# Altium PCB hub_board.PcbDoc
Units mil, origin at the board's own origin, x right, y up, seen from the top; angles counter-clockwise.
Board outline 3543.31 x 2795.28 mil, 2 copper layers (Top Layer, Bottom Layer); 59 components, 46 nets, 218 pads, 53 vias.
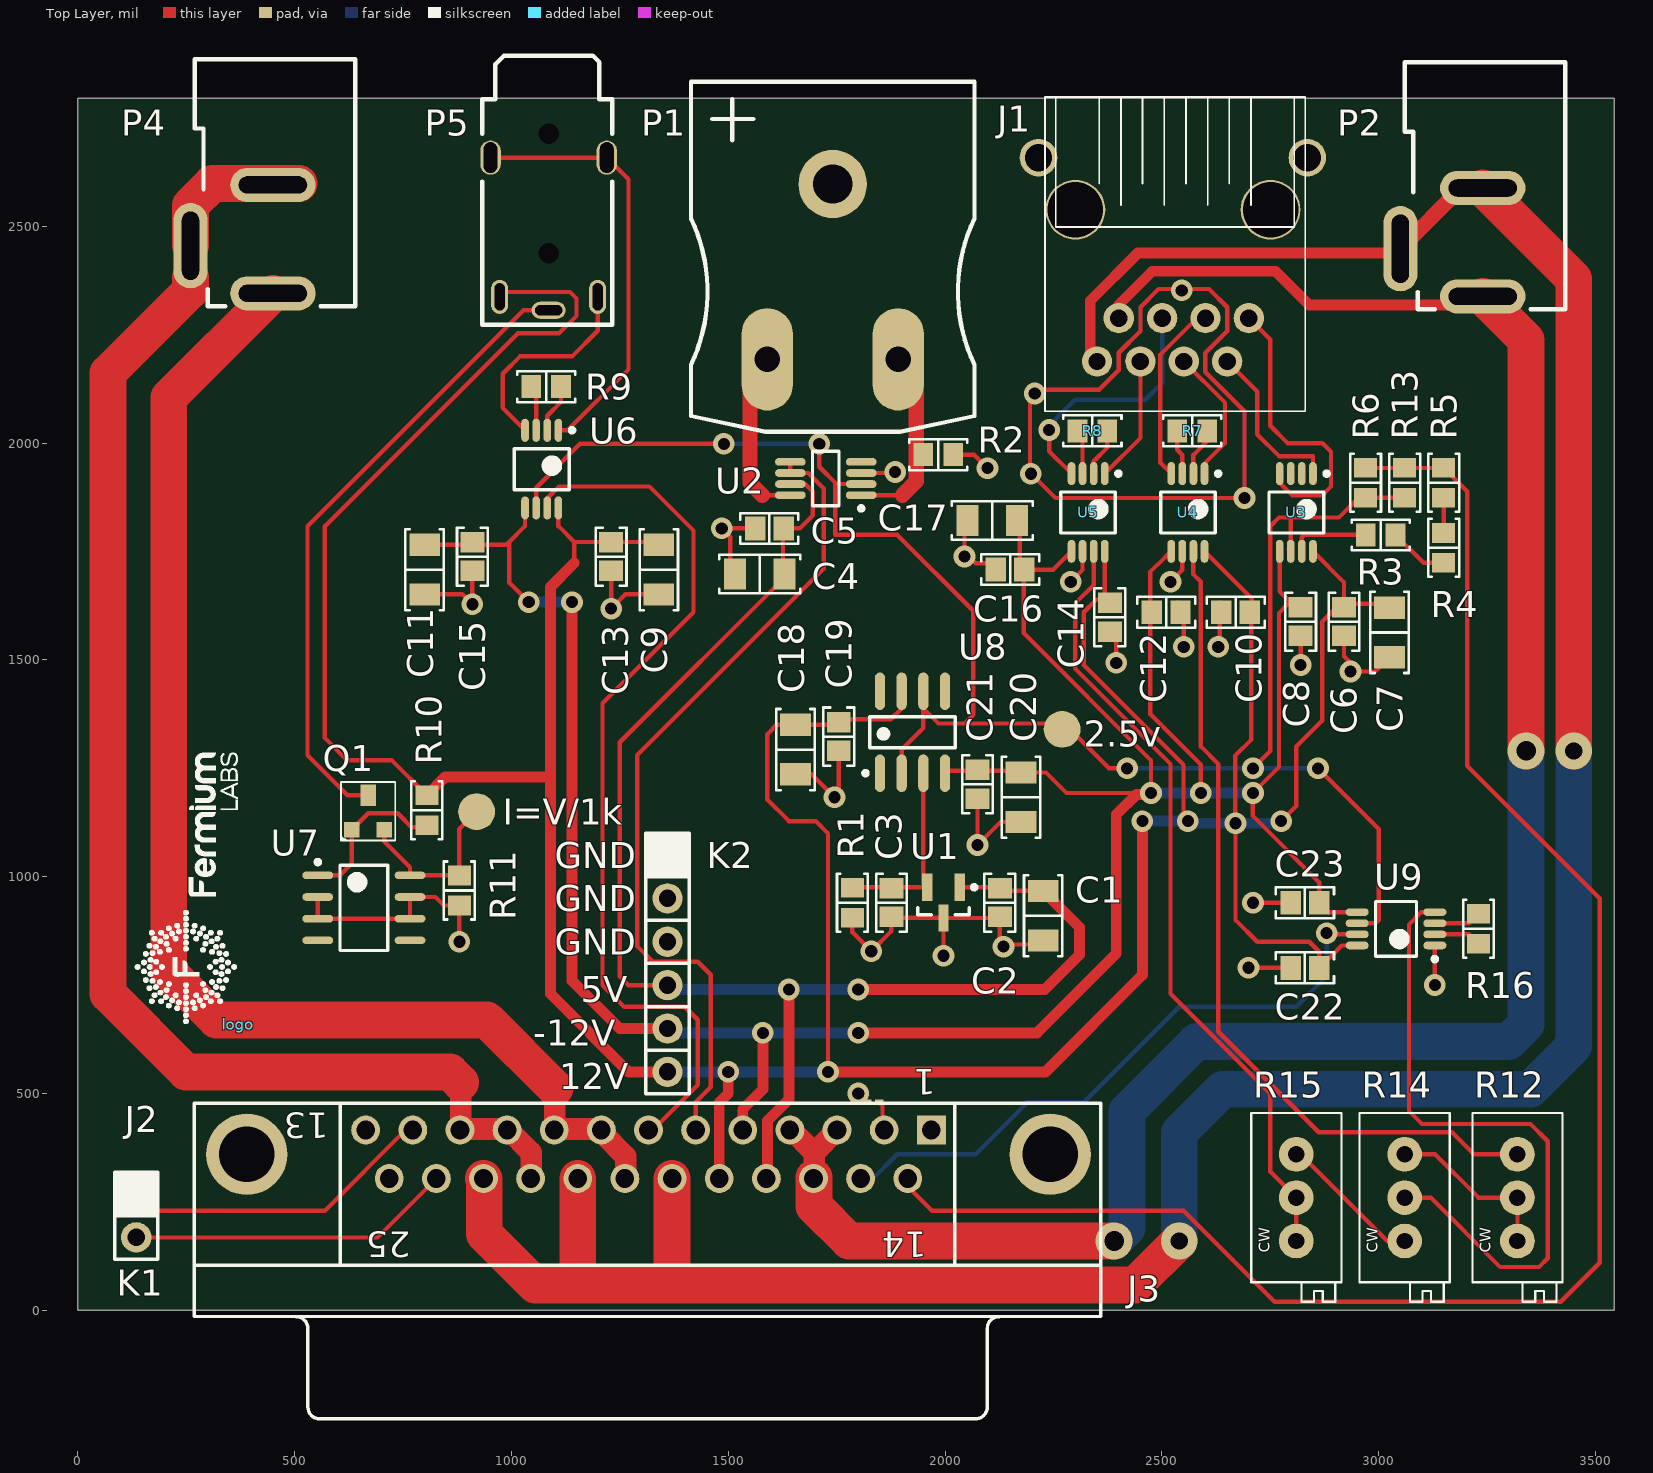
[diagram p0: Top Layer view]
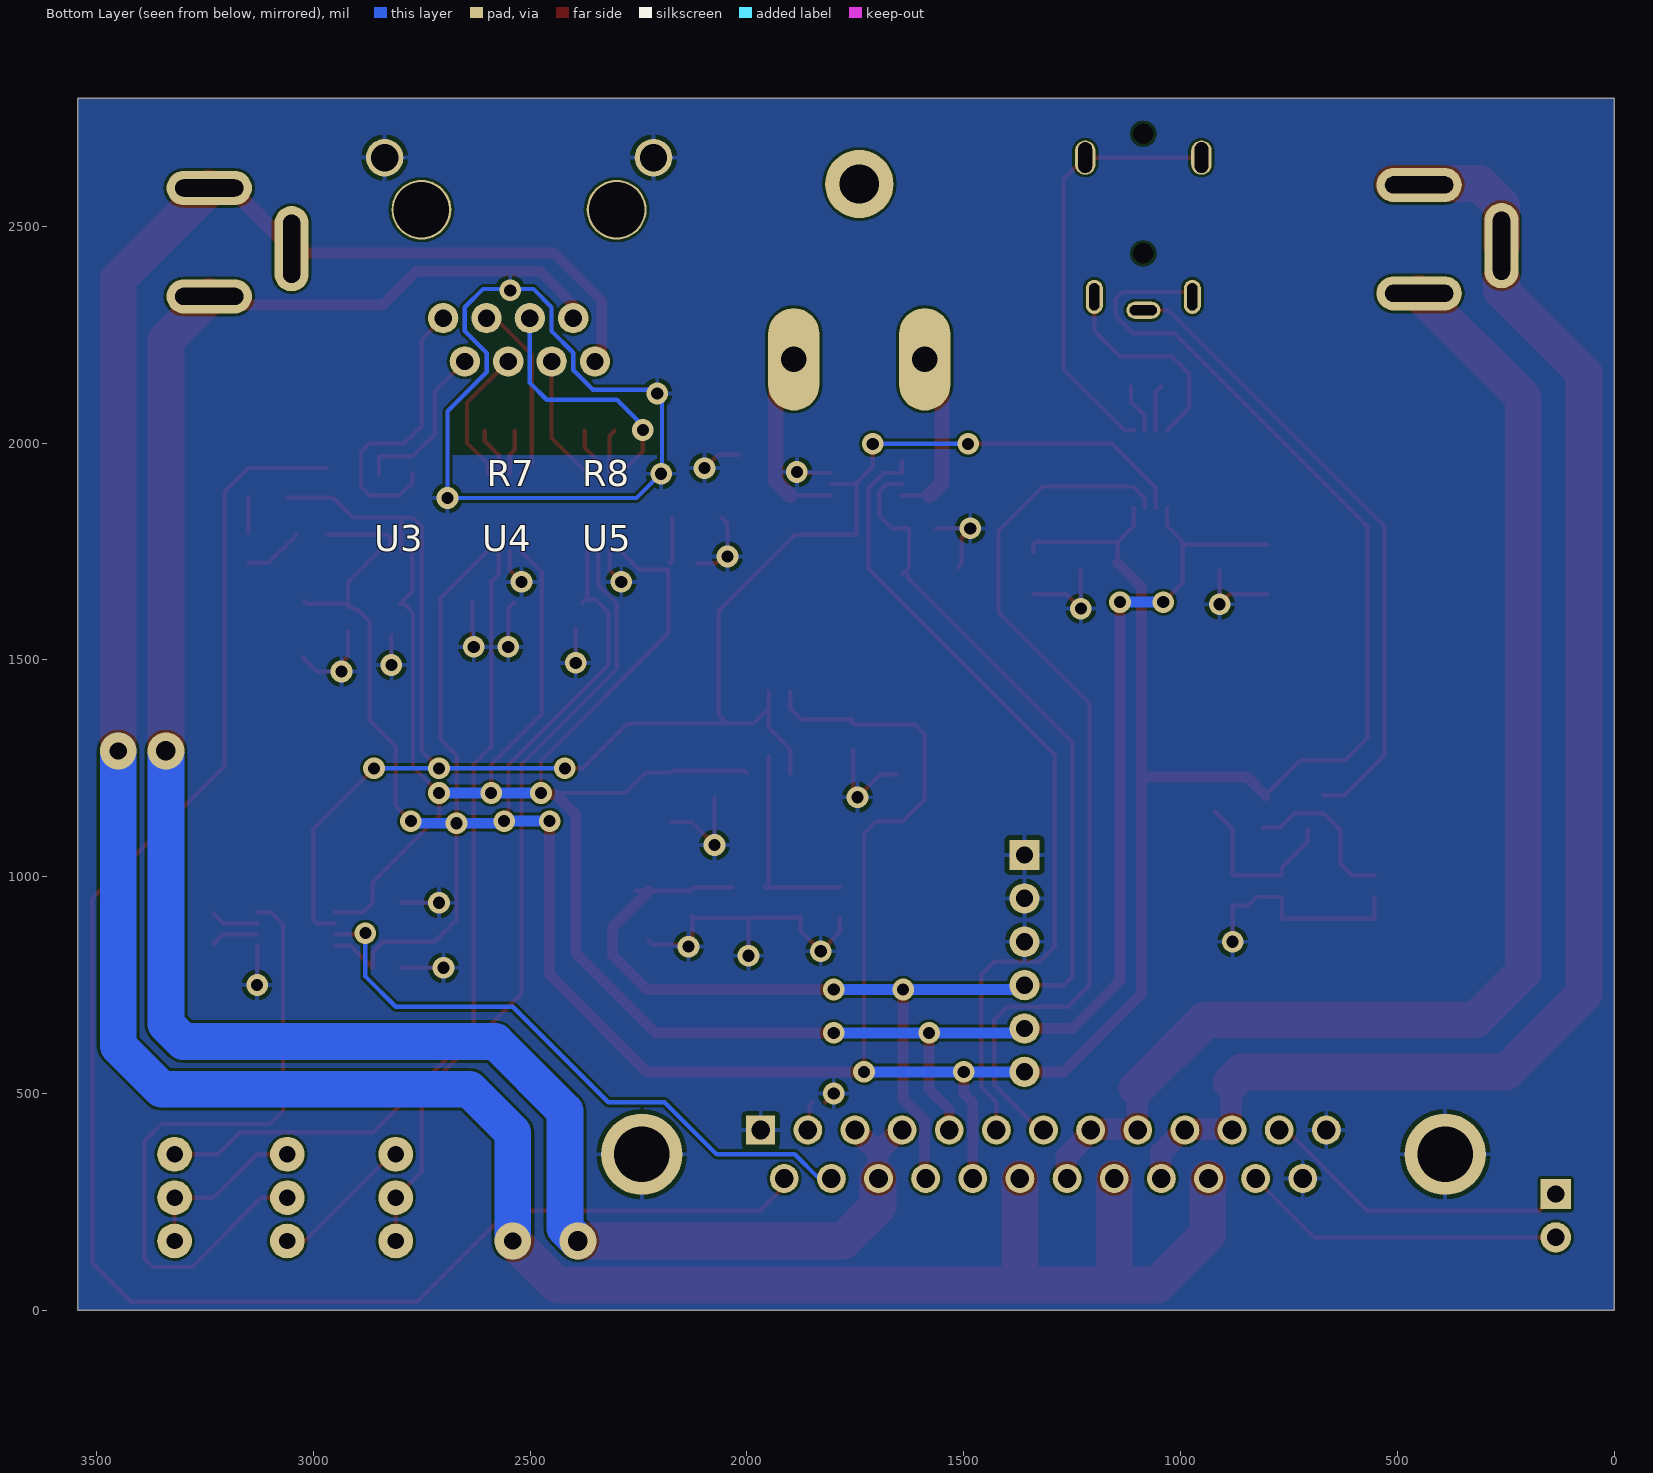
[diagram p1: Bottom Layer view, seen from below]
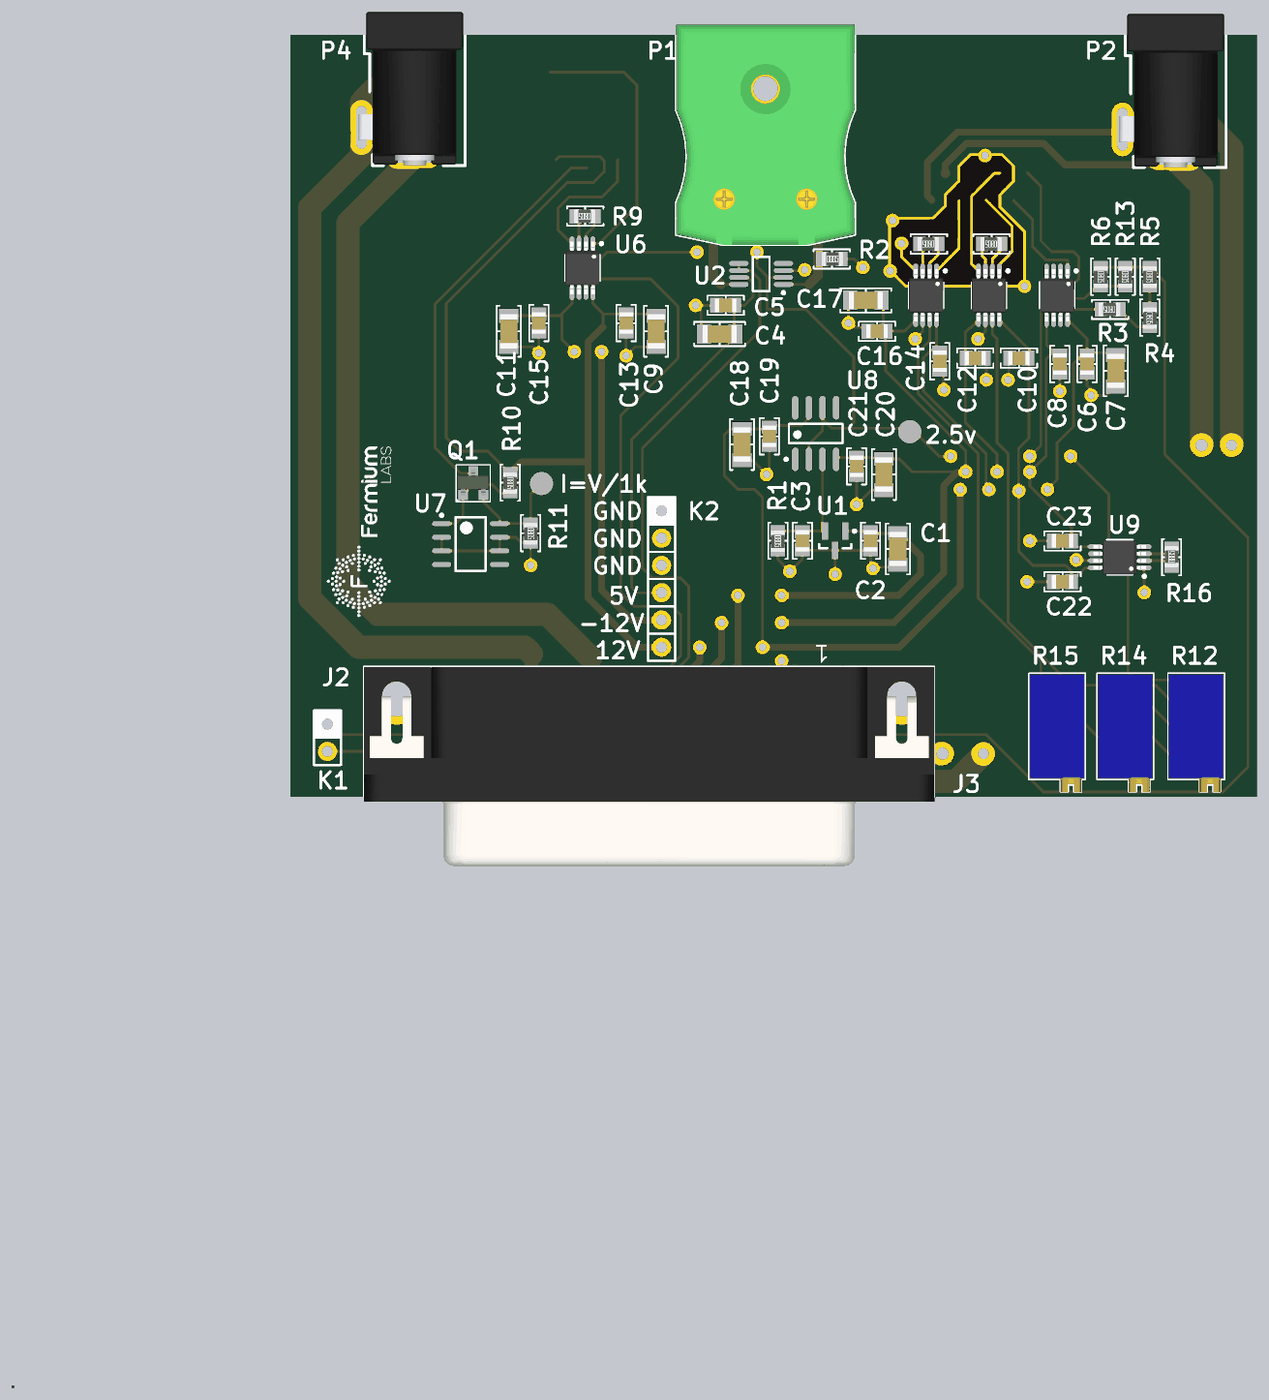
[diagram p2: 3D render of the assembled board from above, using the file's embedded part models]

## Layer stack, top to bottom
Top Solder: solder mask 0.4, Solder Resist, Dk 3.5
Top Layer: signal copper 1.4
Dielectric 1: dielectric 12.6, FR-4, Dk 4.8
Bottom Layer: signal copper 1.4
Bottom Solder: solder mask 0.4, Solder Resist, Dk 3.5

## Board outline
0,0 0,2795.28 3543.31,2795.28 3543.31,0
cut-out: -1023.62,-2165.35 -1013.62,-2165.35 -1013.62,-2155.35 -1023.62,-2155.35

## Design rules (kind name [scope] priority, off if disabled: settings)
Clearance [All] p1: gap=6 ignorepadtopadclearanceinfootprint=FALSE
FanoutControl Fanout_LCC [All] p1 off: bgadir=Out bgaviamode=Centered fanoutstyle=Auto fanoutdirection=Alternating viagrid=1 // Protel DXP Scope 1 Expression Was: IsLCC   Fanout_LCC (Default Rule)
FanoutControl Fanout_BGA [All] p2 off: bgadir=Out bgaviamode=Centered fanoutstyle=Auto fanoutdirection=Alternating viagrid=1 // Protel DXP Scope 1 Expression Was: IsBGA   Fanout_BGA (Default Rule)
FanoutControl Fanout_SOIC [All] p3 off: bgadir=Out bgaviamode=Centered fanoutstyle=Auto fanoutdirection=Alternating viagrid=1 // Protel DXP Scope 1 Expression Was: IsSOIC   Fanout_SOIC (Default Rule)
FanoutControl Fanout_Default [All] p4: bgadir=Out bgaviamode=Centered fanoutstyle=Auto fanoutdirection=Alternating viagrid=1 // Fanout_Default (Default Rule)
FanoutControl Fanout_Small [All] p5 off: bgadir=Out bgaviamode=Centered fanoutstyle=Auto fanoutdirection=Alternating viagrid=1 // Protel DXP Scope 1 Expression Was: (CompPinCount < 5)   Fanout_Small (Default Rule)
HoleSize [All] p1: absolutevalues=TRUE maxlimit=99999 minlimit=11.81 maxpercent=80.000 minpercent=20.000
MinimumSolderMaskSliver [All] p1: minsoldermaskwidth=7.87
PolygonConnect [All] p1: connectstyle=Relief reliefconductorwidth=10 reliefentries=4 polygonreliefangle="90 Angle" airgapwidth=10
RoutingVias [All] p1: holewidth=28 width=50 viastyle="Through Hole" minholewidth=28 minwidth=50 maxholewidth=28 maxwidth=50
SilkToSilkClearance [All] p1: silktosilkclearance=7.87
SilkToSolderMaskClearance [All] p1 off: minsilkscreentomaskgap=10 clearancetoexposedcopper=TRUE // Protel DXP Scope 1 Expression Was: IsPad
SolderMaskExpansion [All] p1: expansion=2
Width [All] p1: maxlimit=200 minlimit=6 preferedwidth=10
21 further rules are at their usual default settings.

## Classes and differential pairs
component class U_instr_amp: C6 C7 C8 C9 C10 C11 C12 C14 C16 C17 C22 C23 J3 R3 R4 R5 R6 R7 R8 R12 R13 R14 R15 R16 U3 U4 U5 U9
component class hub_board: K1 K2 logo P4
component class U_db25: J2
component class U_gaussmeter_and_temp: C4 C5 C13 C15 P1 P5 Q1 R2 R9 R10 R11 U2 U6 U7
component class U_sample_conn: J1 P2
component class U_voltage_ref: C1 C2 C3 C18 C19 C20 C21 R1 U1 U8

## Components (designator, comment, footprint, x,y, rotation, side; value= is the part's Value field where it differs from the comment)
C1 "" "CAP 1206/3216" 2226.38,910.24 r270 top
C2 "" "CAP 0805/2012" 2126.38,940.24 r270 top
C3 "" "CAP 0805/2012" 1876.38,940.24 r270 top
C4 "" "CAP 1206/3216" 1572.91,1698.27 r180 top
C5 "" "CAP 0805/2012" 1595,1803.27 r180 top
C6 "" "CAP 0805/2012" 2920,1588.27 r270 top
C7 "" "CAP 1206/3216" 3025,1563.27 r270 top
C8 "" "CAP 0805/2012" 2820,1588.27 r90 top
C9 "" "CAP 1206/3216" 1340,1708.27 r270 top
C10 "" "CAP 0805/2012" 2670,1610 r180 top
C11 "" "CAP 1206/3216" 800,1708.27 r90 top
C12 "" "CAP 0805/2012" 2510,1610 r180 top
C13 "" "CAP 0805/2012" 1230,1738.27 r270 top
C14 "" "CAP 0805/2012" 2380,1598.27 r270 top
C15 "" "CAP 0805/2012" 910,1738.27 r90 top
C16 "" "CAP 0805/2012" 2150,1708.27 r0 top
C17 "" "CAP 1206/3216" 2108.84,1821.52 r0 top
C18 "Cap2" "CAP 1206/3216" 1655,1293.27 r270 top value=10uF
C19 "" "CAP 0805/2012" 1755,1323.27 r270 top
C20 "Cap2" "CAP 1206/3216" 2175,1183.27 r90 top value=10uF
C21 "" "CAP 0805/2012" 2075,1213.27 r90 top
C22 "" "CAP 0805/2012" 2830,790 r180 top
C23 "" "CAP 0805/2012" 2830,940 r0 top
J1 "" RJ45GE 2666.59,3147.27 r270 top
J2 "" DB25 1968.43,415.91 r180 top
J3 "2 way net tie junction" 2way_LP 1834,480 r0 top net-tie
K1 "HEADER-1X2" HEADER-1X2 135,268.27 r0 top
K2 "HEADER-1X6" HEADER-1X6 1360,1050 r0 top
logo "fermiumlabs-logo" frm-med 370,660 r90 top
P1 "" IM-K-PCB 1741,2597.27 r0 top
P2 "" dc-jack 3240,2338.27 r90 top
P4 "" dc-jack 450,2345.27 r90 top
P5 "" FC68125 533,3653.27 r270 top
Q1 "" SOT23-BCE 632,1108.27 r90 top
R1 "" "RES 0805/2012" 1786.38,940.24 r270 top
R2 "" "RES 0805/2012" 1984.45,1973.27 r0 top
R3 "" "RES 0805/2012" 3004.45,1788.27 r180 top
R4 "" "RES 0805/2012" 3150,1758.27 r270 top
R5 "" "RES 0805/2012" 3150,1908.27 r270 top
R6 "" "RES 0805/2012" 2970,1908.27 r270 top
R7 "" "RES 0805/2012" 2570,2028.27 r180 top
R8 "" "RES 0805/2012" 2340,2028.27 r180 top
R9 "" "RES 0805/2012" 1080,2130 r180 top
R10 "" "RES 0805/2012" 805,1153.27 r270 top
R11 "" "RES 0805/2012" 880,968.27 r270 top
R12 "Multiturn" trimmer-multiturn 3320,160 r90 top
R13 "" "RES 0805/2012" 3060,1908.27 r270 top
R14 "Multiturn" trimmer-multiturn 3060,160 r90 top
R15 "Multiturn" trimmer-multiturn 2810,160 r90 top
R16 "" "RES 0805/2012" 3230,880 r90 top
U1 "" TI-DBZ3_N 1996.38,940.24 r270 top
U2 "" ADI-RM-8_N 1725,1918.27 r180 top
U3 "" "MSOP_MO-187-AA AD8220" 2810,1840 r270 top
U4 "" "MSOP_MO-187-AA AD8220" 2560,1840 r270 top
U5 "" "MSOP_MO-187-AA AD8220" 2330,1840 r270 top
U6 "" "MSOP_MO-187-AA AD8220" 1070,1940 r270 top
U7 "" TI-D8_N#1 660,928.27 r0 top
U8 "" TI-D8_N#2 1925,1333.27 r90 top
U9 "" "MSOP_MO-187-AA AD8220" 3040,880 r180 top

## Footprints (in the part's own frame and the unit in brackets; to place one, negate y for a bottom-side part, rotate by r counter-clockwise, add the part's x,y. Pads: shape width x height; smd on the part's side, far side on the other; paste and mask are expansions set on the pad)
2way_LP [mil] "2 way low power net tie junction"
  rrect5% 20x12 smd paste-100: 1(-14,0) 2(14,0)
ADI-RM-8_N [mm] "SOP, 8-Leads, Body 3x3mm, Pitch 0.65mm, IPC Medium Density"
  oval 1.8x0.45 smd: 1(-2.075,0.975) 2(-2.075,0.325) 3(-2.075,-0.325) 4(-2.075,-0.975) 5(2.075,-0.975) 6(2.075,-0.325) 7(2.075,0.325) 8(2.075,0.975)
  silkscreen extent -2.2,-1.6 0.77,1.87, body extent -1.6,-1.6 1.6,1.6, height 1.1
"CAP 0805/2012" [mm] "Chip Capacitor, 2-Leads, Body 2.00x1.20mm, IPC Medium Density"
  rect 1.2x1.4 smd: 1(-0.838,0) 2(0.838,0)
  silkscreen extent -1.7,-0.9 1.7,0.9, body extent -1,-0.64 1,0.64, height 1.26
"CAP 1206/3216" [mm] "Chip Capacitor, 2-Leads, Body 3.25x1.60mm, IPC Medium Density"
  rect 1.3x1.8 smd: 1(-1.45,0) 2(1.45,0)
  silkscreen extent -2.37,-1.12 2.37,1.12, body extent -1.6,-0.81 1.6,0.81, height 1.62
DB25 [mm]
  rect 1.69x1.69 hole 1.09: 1(0,0)
  round 1.69 hole 1.09: 2(2.761,0) 3(5.522,0) 4(8.283,0) 5(11.044,0) 6(13.805,0) 7(16.566,0) 8(19.327,0) 9(22.088,0) 10(24.849,0) 11(27.61,0) 12(30.371,0) 13(33.132,0) 14(1.381,2.84) 15(4.142,2.84) 16(6.903,2.84) 17(9.664,2.84) 18(12.424,2.84) 19(15.185,2.84) 20(17.946,2.84) 21(20.707,2.84) 22(23.469,2.84) 23(26.23,2.84) 24(28.991,2.84) 25(31.752,2.84)
  round 4.76 hole 3.26: 26(-6.96,1.42) 27(40.092,1.42)
  silkscreen extent -9.93,-1.58 43.17,16.92, body extent -9.95,-1.55 43.15,16.95, height 12.6
dc-jack [mm]
  oval 2x5 hole 1 slot 4 at 90 deg: 1(0,0) 3(6.35,0)
  oval 5x2 hole 1 slot 4 at 0 deg: 2(2.794,4.826)
  silkscreen extent -0.76,-4.83 13.72,4.57, body extent -0.76,-4.62 13.54,5.13, height 11.3
FC68125 [mm]
  oval 1x2 hole 0.6 slot 1.6 at 90 deg: 1(34.214,14.046)
  oval 2x1 hole 0.6 slot 1.6 at 0 deg: 2(33.426,16.916) 6(33.426,11.176)
  oval 2x1.2 hole 0.8 slot 1.8 at 0 deg: 3(25.273,10.643) 3(25.273,17.45)
  round 0 hole 1.2: ""(23.876,14.046) ""(30.886,14.046)
  silkscreen extent 19.3,10.16 35.05,17.78, body extent 19.37,10.31 34.47,17.71, height 6.2
frm-med [mil]
  silkscreen extent 1,1 626,237
HEADER-1X2 [mil]
  rect 70x70 hole 40: 1(0,0)
  round 70 hole 40: 2(0,-100)
  silkscreen extent -50,-150 50,50, body extent -50,-150 50,50, height 470
HEADER-1X6 [mil]
  rect 70x70 hole 40: 1(0,0)
  round 70 hole 40: 2(0,-100) 3(0,-200) 4(0,-300) 5(0,-400) 6(0,-500)
  silkscreen extent -50,-550 50,50, body extent -50,-550 50,50, height 470
IM-K-PCB [mm]
  oval 3x6 hole 1.5: +(-3.835,-10.262) -(3.835,-10.262)
  round 4 hole 2.3: NC(0,0)
  silkscreen extent -8.3,-14.51 8.3,5.99, body extent -8.31,-14.53 8.29,5.97, height 8.5
"MSOP_MO-187-AA AD8220" [mm] "TSOP, 8-Leads, Body 3.00x3.00mm, Pitch 0.65mm, IPC Medium Density"
  oval 1.35x0.45 smd: 1(-2.275,0.975) 2(-2.275,0.325) 3(-2.275,-0.325) 4(-2.275,-0.975) 5(2.275,-0.975) 6(2.275,-0.325) 7(2.275,0.325) 8(2.275,0.975)
  silkscreen extent -2.4,-1.6 1.2,1.9, body extent -2.45,-1.6 2.45,1.6, height 1.1
"RES 0805/2012" [mm] "Chip Resistor, 2-Leads, Body 2.00x1.25mm, IPC Medium Density"
  rect 1.15x1.35 smd: 1(-0.875,0) 2(0.875,0)
  silkscreen extent -1.7,-0.9 1.7,0.9, body extent -0.95,-0.62 1.05,0.63, height 0.6
RJ45GE [mil]
  round 70 hole 40: 1(859,34) 2(959,-16) 3(859,-66) 4(959,-116) 5(859,-166) 6(959,-216) 7(859,-266) 8(959,-316)
  round 137.8 hole 127.95 unplated: A(609,-366) B(609,84)
  round 86.61 hole 62.99: G(489,169) G(489,-451)
  silkscreen extent 349,-436 1074,164, body extent 282,-493 1017,207, height 534
SOT23-BCE [mil]
  rect 36x36 smd: B(0,0) E(0,-75)
  rect 50x36 smd: C(80,-38)
  silkscreen extent -25,-100 110,25, body extent -3,-95 94,20, height 41
TI-D8_N#1 [mm] "SOIC, 8-Leads, Body 4.9x3.9mm, Pitch 1.27mm, IPC Medium Density"
  oval 1.8x0.45 smd: 1(-2.7,1.905) 2(-2.7,0.635) 3(-2.7,-0.635) 4(-2.7,-1.905) 5(2.7,-1.905) 6(2.7,-0.635) 7(2.7,0.635) 8(2.7,1.905)
  silkscreen extent -2.82,-2.5 1.4,2.8, body extent -2,-2.5 2,2.5, height 1.75
TI-D8_N#2 [mm] "SOIC, 8-Leads, Body 4.9x3.9mm, Pitch 1.27mm, IPC Medium Density"
  oval 2.2x0.6 smd: 1(-2.4,1.905) 2(-2.4,0.635) 3(-2.4,-0.635) 4(-2.4,-1.905) 5(2.4,-1.905) 6(2.4,-0.635) 7(2.4,0.635) 8(2.4,1.905)
  silkscreen extent -2.52,-2.5 0.9,2.88, body extent -2,-2.5 2,2.5, height 1.75
TI-DBZ3_N [mm] "SOT23, 3-Leads, Body 2.92x1.3 mm, Pitch 0.95 mm, IPC Medium Density"
  rect 1.6x0.6 smd: 1(-0.9,0.95) 2(-0.9,-0.95) 3(0.9,0)
  silkscreen extent -1.02,-1.5 0.7,1.93, body extent -0.7,-1.52 0.7,1.52, height 1.12
trimmer-multiturn [mil]
  round 80 hole 38: 1(0,0) 2(200,0) 3(100,0)
  silkscreen extent -140,-104 295,104, body extent -140,-98 289,98, height 394

## Part data
C1 C4 C7 C9 C11 C17: library part Cap2, "Capacitor", Capacitance=10µF, Capacitor kind=MLCC, Capacitor type=ceramic, Case - inch=1206, Case - mm=3216, Dielectric=X5R, Manufacturer=SAMSUNG, Manufacturer Part Number=CL31A106KAHNNNE, Operating temperature=-55...85°C, Operating voltage=25V, Tolerance=±10%, Category="1206 MLCC SMD Capacitors", ComponentLink1Description=http://static.tme.eu/products_pics/b/e/9/be9e0dd298dcf4979ea1dd3d226e0bfa/58780.jpg, ComponentLink1URL=http://static.tme.eu/products_pics/b/e/9/be9e0dd298dcf4979ea1dd3d226e0bfa/58780.jpg, MinAmount=100, Mounting=SMD, Multiples=100, PackageDescription=1206, PackageReference=CAPR5-4X5, Pads="2 SMD", Price Type=NET, Pricing 1="100=0.0248, 300=0.0203, 1000=0.0167, 2000=0.0131, 10000=0.0127 (EUR)", Published=23-Sep-2002, Publisher="Altium Limited", Stock 1=279700, SuppliedAmount=0, Supplier 1=TME, Supplier Part Number 1=CL31A106KAHNNNE, Unit=pcs, Weight=0.061
C2 C3 C5 C6 C8 C10 C12 C13 C14 C15 C16 C19 C21 C22 C23: library part Cap2, "Capacitor", Capacitance=100nF, Capacitor kind=MLCC, Capacitor type=ceramic, Case - inch=0805, Case - mm=2012, Dielectric=X7R, Manufacturer=YAGEO, Manufacturer Part Number=CC0805JRX7R9BB104, Operating voltage=50V, Supplier Part Number 1=CC0805JRX7R9104, Tolerance=±5%, Category="0805 MLCC SMD Capacitors", ComponentLink1Description=http://static.tme.eu/products_pics/d/b/b/dbbd93eaf25225110ca26eb66da77328/58538.jpg, ComponentLink1URL=http://static.tme.eu/products_pics/d/b/b/dbbd93eaf25225110ca26eb66da77328/58538.jpg, MinAmount=100, Mounting=SMD, Multiples=100, Price Type=NET, Pricing 1="100=0.00613, 300=0.00464, 1000=0.00342, 4000=0.00284, 20000=0.00273 (EUR)", Stock 1=89911, SuppliedAmount=0, Supplier 1=TME, Unit=pcs, Weight=0.042
  C3 C5 C6 C8 C10 C12 C13 C14 C15 C16 C19 C21 C22 C23: Pads="2 SMD"
C18 C20: "Capacitor", Capacitance=10µF, Capacitor kind=MLCC, Capacitor type=ceramic, Case - inch=1206, Case - mm=3216, Dielectric=X5R, Manufacturer=SAMSUNG, Manufacturer Part Number=CL31A106KAHNNNE, Operating temperature=-55...85°C, Operating voltage=25V, Tolerance=±10%, Category="1206 MLCC SMD Capacitors", ComponentLink1Description=http://static.tme.eu/products_pics/b/e/9/be9e0dd298dcf4979ea1dd3d226e0bfa/58780.jpg, ComponentLink1URL=http://static.tme.eu/products_pics/b/e/9/be9e0dd298dcf4979ea1dd3d226e0bfa/58780.jpg, MinAmount=100, Mounting=SMD, Multiples=100, PackageDescription=1206, PackageReference=CAPR5-4X5, Pads="2 SMD", Price Type=NET, Pricing 1="100=0.0248, 300=0.0203, 1000=0.0167, 2000=0.0131, 10000=0.0127 (EUR)", Published=23-Sep-2002, Publisher="Altium Limited", Stock 1=279700, SuppliedAmount=0, Supplier 1=TME, Supplier Part Number 1=CL31A106KAHNNNE, Unit=pcs, Weight=0.061
J1: library part RJ45-GENERIC, "Connector  RJ45 8 PIN", Manufacturer=NINIGI, Manufacturer Part Number=RJ45GE, Category="RJ connectors", ComponentLink1Description=http://static.tme.eu/products_pics/0/e/e/0ee711a9a85500572fe5689c7f237f48/338553.jpg, ComponentLink1URL=http://static.tme.eu/products_pics/0/e/e/0ee711a9a85500572fe5689c7f237f48/338553.jpg, Connector=socket, Connector type=RJ45, Connector variant=shielded, Electrical mounting=THT, MinAmount=1, Multiples=1, Number of pins=8, Pads="10 THT", Price Type=NET, Pricing 1="1=0.609, 10=0.4872, 50=0.3897, 200=0.3045, 1000=0.2741 (EUR)", Spatial orientation="angled 90°", Stock 1=27637, SuppliedAmount=0, Supplier 1=TME, Supplier Part Number 1=RJ45GE, Type of pin configuration=8p8c, Unit=pcs, Weight=4.4
J2: library part "D Connector 25", "d-sub, 25 pins,  Right Angle", Manufacturer="ADAM TECH", Manufacturer Part Number=DB25-SL-24, Category="D-Sub connectors", Pads="29 THT", Supplier 1=TME, Supplier Part Number 1=DB25-SL-24
J3: library part 2way, ComponentLink1Description=Source, ComponentLink1URL=http://www.edatools.cz/addons, FootprintNote="LP=12mil, MP=40mil, HP=120mil"
P1: library part "Header 2", "K thermocouple connector", Manufacturer=LABFACILITY, Manufacturer Part Number=IM-K-PCB, Supplier Part Number 1=3810628, Pads="2 THT", Supplier 1=Farnell
P2: library part jackdc, Manufacturer=CLIFF, Manufacturer Part Number="DC-10A FC68148", Package type="in bulk", Rated current=5A, Rated voltage="12V DC", Supplier Part Number 1=FC68148, Category="DC power connectors", ComponentLink1Description=http://static.tme.eu/products_pics/f/8/e/f8eb2e1bea4ffe6692f5958f8ef9edd4/323250.jpg, ComponentLink1URL=http://static.tme.eu/products_pics/f/8/e/f8eb2e1bea4ffe6692f5958f8ef9edd4/323250.jpg, Connector=socket, Connector type="DC supply", Connector variant="with on/off switch", Contact size=5,5/2,1mm, Electrical mounting=soldering, MinAmount=1, Multiples=1, Pads="3 THT", Plug inside diameter=2.1mm, Plug outside diameter=5.5mm, Price Type=NET, Pricing 1="1=0.4194, 20=0.3065, 100=0.2581, 500=0.2258 (USD)", Spatial orientation="angled 90°", Stock 1=20287, SuppliedAmount=0, Supplier 1=TME, Unit=pcs, Weight=1.733
P4: library part jackdc, Manufacturer=CLIFF, Manufacturer Part Number="DC-10A FC68148", Supplier Part Number 1=FC68148, Pads="3 THT"
P5: library part FC68125, Manufacturer=CLIFF, Category="Jack connectors", ComponentLink1Description=http://static.tme.eu/products_pics/9/3/a/93a060f269bb569398921100f84c519a/360179.jpg, ComponentLink1URL=http://static.tme.eu/products_pics/9/3/a/93a060f269bb569398921100f84c519a/360179.jpg, Connector=socket, Connector type="Jack 3,5mm", Depth=15.1mm, Electrical mounting=THT, Height=6mm, Manufacturer Part Number=FC68125, MinAmount=2, Multiples=1, Number of ways=4, Pads="5 THT", Price Type=NET, Pricing 1="2=0.41, 20=0.37, 100=0.33, 500=0.28 (USD)", Stock 1=1312, SuppliedAmount=0, Supplier 1=TME, Supplier Part Number 1=FC68125, Unit=pcs, Weight=0.942, Width=7.1mm
Q1: library part BC847, "NPN TRANSISTOR", Case=SOT23, Collector-emitter voltage=50V, Collector current=100mA, Manufacturer=NXP, Manufacturer Part Number=BC847A.215, Package type=reel, Quantity in package=3000pcs., Category="NPN SMD Transistors", ComponentLink1Description=http://static.tme.eu/products_pics/b/2/d/b2d52d61b89775d5a69a2709edebf449/322489.jpg, ComponentLink1URL=http://static.tme.eu/products_pics/b/2/d/b2d52d61b89775d5a69a2709edebf449/322489.jpg, MinAmount=25, Mounting=SMD, Multiples=1, Pads="3 SMD", Polarisation=bipolar, Price Type=NET, Pricing 1="25=0.0184, 100=0.0119, 500=0.0101, 3000=0.00834, 12000=0.00776 (EUR)", Stock 1=12409, SuppliedAmount=0, Supplier 1=TME, Supplier Part Number 1=BC847A.215, Transistor type=NPN, Unit=pcs, Weight=0.036
R1 R3 R4 R5 R6 R11 R13: library part Res1, "Resistor", Case - inch=0805, Case - mm=2012, Kind of resistor=precise, Manufacturer=VIKING, Manufacturer Part Number=AR05BTCW1001, Manufacturer series=AR, Max. operating voltage=150V, Max. overload voltage=300V, Operating temperature=-55...155°C, Power=0.125W, Resistance=1kO, Resistor type="thin film", Supplier Part Number 1=AR0805-1K-0.1%, Temperature coefficient=25ppm/°C, Tolerance=±0.1%, Category="0805 SMD Precision Resistors", ComponentLink1Description=http://static.tme.eu/products_pics/6/6/c/66cc5cd64257edd80ca8e9fd2040972d/56038.jpg, ComponentLink1URL=http://static.tme.eu/products_pics/6/6/c/66cc5cd64257edd80ca8e9fd2040972d/56038.jpg, LatestRevisionDate=17-Jul-2002, LatestRevisionNote="Re-released for DXP Platform.", MinAmount=10, Mounting=SMD, Multiples=10, PackageDescription="Axial Device, Thru-Hole; 2 Leads; 0.3 in Pin Spacing", PackageReference=AXIAL-0.3, Pads="2 SMD", Price Type=NET, Pricing 1="10=0.11211, 100=0.05707, 1000=0.03771, 5000=0.03176 (EUR)", Pricing 2="10=0.11119, 100=0.05661, 1000=0.0374, 5000=0.0315 (EUR)", Published=8-Jun-2000, Publisher="Altium Limited", Stock 1=0, Stock 2=750, SuppliedAmount=0, Supplier 1=TME, Supplier 2=TME, Supplier Part Number 2=AR0805-1K13-0.1%, Unit=pcs, Weight=0.034
R2: library part Res1, "Resistor", Case - inch=0805, Case - mm=2012, Manufacturer="ROYAL OHM", Manufacturer Part Number=0805S8J0105T5E, Max. operating voltage=150V, Max. overload voltage=300V, Operating temperature=-55...125°C, Power=0.125W, Resistance=1MO, Resistor type="thick film", Supplier Part Number 1=SMD0805-1M, Temperature coefficient=100ppm/°C, Tolerance=±5%, Category="0805 SMD Resistors", ComponentLink1Description=http://static.tme.eu/products_pics/a/3/4/a34f7a182e69d69fdfdb65c44b99ca64/60560.jpg, ComponentLink1URL=http://static.tme.eu/products_pics/a/3/4/a34f7a182e69d69fdfdb65c44b99ca64/60560.jpg, LatestRevisionDate=17-Jul-2002, LatestRevisionNote="Re-released for DXP Platform.", MinAmount=100, Mounting=SMD, Multiples=100, PackageDescription="Axial Device, Thru-Hole; 2 Leads; 0.3 in Pin Spacing", PackageReference=AXIAL-0.3, Pads="2 SMD", Price Type=NET, Pricing 1="100=0.00616, 1000=0.00237, 5000=0.00081, 15000=0.00077, 50000=0.00074 (EUR)", Published=8-Jun-2000, Publisher="Altium Limited", Stock 1=9400, SuppliedAmount=0, Supplier 1=TME, Unit=pcs, Weight=0.031
R7 R8 R9 R16: library part Res1, "Resistor", Pads=N/A
R10: library part Res1, "Resistor", Case - inch=0805, Case - mm=2012, Kind of resistor=precise, Manufacturer="ROYAL OHM", Manufacturer Part Number=TC0525B4990T1E, Max. operating voltage=100V, Max. overload voltage=200V, Power=100mW, Resistance=499O, Resistor type="thin film", Temperature coefficient=25ppm/°C, Tolerance=±0.1%, Category="0805 SMD Precision Resistors", ComponentLink1Description=http://static.tme.eu/products_pics/9/f/6/9f65441075116f8118ec43255d000045/56542.jpg, ComponentLink1URL=http://static.tme.eu/products_pics/9/f/6/9f65441075116f8118ec43255d000045/56542.jpg, MinAmount=10, Mounting=SMD, Multiples=10, Pads="2 SMD", Price Type=NET, Pricing 1="10=0.11377, 50=0.08438, 250=0.06352, 1000=0.05404 (EUR)", Stock 1=1880, SuppliedAmount=0, Supplier 1=TME, Supplier Part Number 1=TC0525B4990T1E, Unit=pcs, Weight=0.079
R12 R15: library part RPot, "Potentiometer", Manufacturer="SR PASSIVES", Manufacturer Part Number=T910X-20K, Resistance=20KO, Pads="3 THT", Supplier 1=TME, Supplier Part Number 1=T910X-20K
R14: library part RPot, "Potentiometer", Manufacturer="SR PASSIVES", Manufacturer Part Number=T910X-5K, Resistance=5KO, Pads="3 THT", Supplier 1=TME, Supplier Part Number 1=T910X-5K
U1: library part REF3025AIDBZR, "Voltage reference, 2.5V", Manufacturer="Texas Instruments", Maximum Operating Temperature="+ 125 C", Minimum Operating Temperature="- 40 C", Operating Supply Current="42 uA", Operating Temperature Range="- 40 C to + 125 C", Output voltage="2.5 V", Package / Case=SOT-23-3, Series VREF - Input Voltage - Max="5.5 V", Shunt Current - Max="25 mA", Supplier Part Number 1=595-REF3025AIDBZR, Supply Current - Max="50 uA", Temperature coefficient="50 PPM / C", Accuracy="100 uV/mA", Brand="Texas Instruments", Category="Voltage References", Height="1 mm", Initial Accuracy="0.2 %", Length="2.92 mm", Manufacturer Part Number=REF3025AIDBZR, Minimum Order Quantity=1, Mounting Style=SMD/SMT, Packaging=Reel, Pads="3 SMD", Pricing 1="1=1.29, 10=1.15, 25=1.06, 50=0.950, 100=0.900, 250=0.841, 500=0.743, 1000=0.508, 3000=0.508 (EUR)", Product="Voltage References", Reeling=True, Reference Type="Series References", RoHS="RoHS Compliant", RoHS - Mouser=Y, Series=REF3025, Standard Pack Qty=3000, Stock 1=2808, Supplier 1=Mouser, Topology="Series References", Width="1.3 mm"
U2: library part AD8494ARMZ, "K thermocouple amplifier", Manufacturer="Analog Devices", Manufacturer Part Number=AD8495ARMZ, Maximum Operating Temperature="+ 125 C", Minimum Operating Temperature="- 40 C", Operating Supply Current="180 uA", Package / Case=MSOP-8, Supplier Part Number 1=584-AD8495ARMZ, Supply Voltage - Max="18 V", Supply Voltage - Min="2.7 V", Brand="Analog Devices", Category="Sensor Interface", ComponentLink1Description=http://www.mouser.com/ds/2/609/AD8494_8495_8496_8497-877834.pdf, ComponentLink1URL=http://www.mouser.com/ds/2/609/AD8494_8495_8496_8497-877834.pdf, Interface Type=2-wire, Minimum Order Quantity=1, Mounting Style=SMD/SMT, Output type=Analog, Packaging=Tube, Pads="8 SMD", Pricing 1="1=4.35, 10=3.88, 25=3.49, 50=3.28, 100=3.19, 250=2.88, 500=2.56, 1000=2.25 (EUR)", Reeling=False, RoHS="RoHS Compliant", RoHS - Mouser=Y, Series=AD8495, Standard Pack Qty=50, Stock 1=2392, Supplier 1=Mouser, Type="Thermocouple Amplifier"
U3 U6 U9: library part AD8226, "Instrumentation amplifier", Dual Supply Voltage="1.35 V to 18 V", Ib - Input Bias Current="35 nA", Manufacturer="Analog Devices", Manufacturer Part Number=AD8226ARMZ, Maximum Input Resistance="800 MOhms at +/- 15 V", Maximum Operating Temperature="+ 125 C", Minimum Operating Temperature="- 40 C", Operating Supply Current="325 uA", Operating Supply Voltage="2.2 V to 36 V", Package / Case=MSOP-8, Supplier Part Number 1=584-AD8226ARMZ, Supply Voltage - Max="36 V", Supply Voltage - Min="2.2 V", Voltage Gain dB="60 dB", Vos - Input Offset Voltage="100 uV", 3 dB Bandwidth="1.5 MHz", Amplifier Type="Instrumentation Amplifier", Brand="Analog Devices", Category="Instrumentation Amplifiers", CMRR - Common Mode Rejection Ratio="120 dB", ComponentLink1Description=http://www.mouser.com/ds/2/609/AD8226-877720.pdf, ComponentLink1URL=http://www.mouser.com/ds/2/609/AD8226-877720.pdf, Gain V/V="1 V/V to 1000 V/V", GBP - Gain Bandwidth Product=-, Height="0.85 mm", Length="3 mm", Minimum Order Quantity=1, Mounting Style=SMD/SMT, Number of channels="1 Channel", Packaging=Tube, Pads="8 SMD", Pricing 1="1=2.48, 10=2.22, 25=1.99, 50=1.87, 100=1.82, 250=1.64, 500=1.47, 1000=1.28 (EUR)", Product="Instrumentation Amplifiers", Reeling=False, RoHS="RoHS Compliant", RoHS - Mouser=Y, Series=AD8226, SR - Slew Rate="0.4 V/us", Standard Pack Qty=50, Stock 1=679, Supplier 1=Mouser, Supply Type="Single, Dual", Vcm - Common Mode Voltage="2.2 V to 36 V", Width="3 mm"
U4 U5: library part AD8226, "Instrumentation amplifier", Case=MSOP8, Manufacturer="ANALOG DEVICES", Manufacturer Part Number=AD8220ARMZ, Operating temperature=-40...85°C, Supply voltage="4.5...36V DC", Transmission band frequency=1.5MHz, Category="SMD Operational Amplifiers", ComponentLink1Description=http://static.tme.eu/products_pics/5/3/1/531d7915b61678c8109674b14bfbf850/285547.jpg, ComponentLink1URL=http://static.tme.eu/products_pics/5/3/1/531d7915b61678c8109674b14bfbf850/285547.jpg, Integrated circuit type="operational amplifier", MinAmount=1, Mounting=SMD, Multiples=1, Number of channels=1, Pads="8 SMD", Price Type=NET, Pricing 1="1=5.19, 3=4.91, 10=4.16, 25=3.87 (EUR)", Slew rate=2V/µs, Stock 1=47, SuppliedAmount=0, Supplier 1=TME, Supplier Part Number 1=AD8220ARMZ, Unit=pcs, Weight=3.79
U7: library part TL431ACD, "Adjustable Precision Shunt Regulator", Case=SO8, Manufacturer="TEXAS INSTRUMENTS", Output voltage=2.5...36V, Category="Reference Voltage Sources - Circuits", ComponentLink1Description=http://static.tme.eu/products_pics/f/b/8/fb840e32b578dec2f5f44f6e02ebb846/218579.jpg, ComponentLink1URL=http://static.tme.eu/products_pics/f/b/8/fb840e32b578dec2f5f44f6e02ebb846/218579.jpg, Integrated circuit type="voltage reference source", Manufacturer Part Number=TL431ACD, MinAmount=10, Mounting=SMD, Multiples=1, Pads="6 SMD", Price Type=NET, Pricing 1="10=0.0783, 50=0.0746, 250=0.0654, 1000=0.0565, 5000=0.0517 (EUR)", Stock 1=3090, SuppliedAmount=0, Supplier 1=TME, Supplier Part Number 1=TL431ACD, Unit=pcs, Weight=0.174
U8: library part OP07CDR, "Low-Offset Voltage Operational Amplifier, 6 to 36 V, 0 to 70 degC, 8-pin SOIC (D8), Green (RoHS & no Sb/Br)", Case=SO8, Manufacturer="TEXAS INSTRUMENTS", Supply voltage="3...18V DC", Transmission band frequency=600kHz, Category="SMD Operational Amplifiers", ComponentLink1Description=http://static.tme.eu/products_pics/4/8/a/48a33ccfb5a851d5982dcdda0776f7ac/285338.jpg, ComponentLink1URL=http://static.tme.eu/products_pics/4/8/a/48a33ccfb5a851d5982dcdda0776f7ac/285338.jpg, Integrated circuit type="operational amplifier", Manufacturer Part Number=OP07CDR, MinAmount=3, Mounting=SMD, Multiples=1, Number of channels=1, Pads="8 SMD", Price Type=NET, Pricing 1="3=0.2668, 10=0.2451, 50=0.2177, 250=0.1848, 1000=0.165 (EUR)", Slew rate=0.3V/µs, Stock 1=2258, SuppliedAmount=0, Supplier 1=TME, Supplier Part Number 1=OP07CDR, Unit=pcs, Weight=0.23

## Free pads (board coordinates)
  round 85 smd: 2.5v(2270,1340) 5(920,1150)

## Via types
v1: diameter 50, hole 28, Top Layer to Bottom Layer, 49 vias
v2: diameter 85, hole 40, Top Layer to Bottom Layer, 2 vias
v3: diameter 85, hole 45, Top Layer to Bottom Layer, 2 vias

## Nets (pads, with @x,y where several pads share a name; then routed paths per layer and width w, separated by ;. In a path a pad name is that pad's centre, name@x,y a point inside that pad or via, vN(x,y) a via of type N, cw(c..) or ccw(c..) an arc to the next point about the centre after c; other vN are vias at no path point)
2.5V: pad.2.5v R6.2 R13.2 U2.2 U3.6 U6.6 U8.2 U8.6 U9.6 | length 4351.9
  Top Layer w10: U6.6 1057.2,1897.2 1158.27,1998.27 v1(1490,1998.27) ; v1(1710,1998.27) 1710,1945.47 1749.7,1905.77 U2.2@1772.5,1905.77 ; U2.2 1747.2,1905.47 1747.2,1788.27 1890,1788.27 2065,1613.27 2065,1373.27 2045,1353.27 ; U8.2 1900,1293.27 1950,1343.27 U8.6@1950,1388.27 ; U8.6 U8.6@1950,1388.27 ; v1(2420,1250) 2378.27,1250 2275,1353.27 2045,1353.27 ; v1(2710,1250) 2750,1290 2750,1808.27 2770,1828.27 2800,1828.27 ; U3.6@2792.46,1755.18 U3.6 2797.2,1825.47 2800,1828.27 ; v1(2860,1250) 3000,1110 3000,900 2992.8,892.8 U9.6 ; R13.2 R6.2 2953.82,1873.82 2908.27,1828.27 2800,1828.27 ; U8.6@1950,1388.27 1985,1353.27 2045,1353.27
  Bottom Layer w10: v1(1490,1998.27) 1500,1988.27 1510,1998.27 v1(1710,1998.27) ; v1(2420,1250) v1(2710,1250) v1(2860,1250)
5V: C1.1 C2.1 C4.1 C5.1 J2.17 K2.4 U1.1 U2.7 | length 3355.3
  Top Layer w10: K2.4 1270,750 1250,770 1250,1310 1630,1690 C4.1 ; C4.1@1642.09,1698.27 1626.5,1713.86 1626.5,1803.27 C5.1 1665,1803.27 1695,1833.27 1695,1888.27 1677.8,1905.47 U2.7 ; U1.1 2078.03,975.67 2122.45,975.66 2125.63,972.48 C2.1@2126.38,971.73 ; C2.1@2130.79,967.32 C1.1 C1.1@2255,967.32
  Top Layer w25: J2.17 1590.56,306.68 1590.56,437.35 1640,486.79 v1(1640,740) ; v1(1800,740) 2230,740 2310,820 2310,883.7 C1.1
  Bottom Layer w25: K2.4 1370,740 v1(1640,740) v1(1800,740)
12v: C6.1 C7.1 C9.1 C10.1 C13.1 C14.1 C18.1 C19.1 C22.1 J2.18 K2.6 P5.6 R10.1 U3.8 U4.8 U5.8 U6.8 U8.7 U9.8 | length 10066.3
  Top Layer w10: R10.1 724.45,1268.27 621.73,1268.27 570,1320 570,1808.27 1015,2253.27 1110,2253.27 1150,2293.27 1150,2333.27 1135,2348.27 984,2348.27 P5.6 ; U6.8 1108.39,1808.58 1145,1771.97 ; 1145,1723.27 1145,1771.97 ; C9.1@1340,1748.27 C9.1 1333.39,1771.97 1145,1771.97 ; v1(1730,550) 1730,1100 1701.73,1128.27 1640,1128.27 1590,1178.27 1590,1328.27 1612.09,1350.35 C18.1 1750.59,1350.35 1755,1354.76 C19.1@1760.71,1354.76 ; C19.1@1756.5,1363.27 1875,1363.27 1900,1388.27 U8.7 ; U5.8 2368.39,1642.88 C14.1@2372.09,1639.17 ; C14.1 C14.1@2372.09,1639.17 ; v1(2560,1128.27) 2550,1128.27 2550,1258.27 2320,1488.27 2320,1610 2349.17,1639.17 C14.1@2372.09,1639.17 ; U4.8 2708,1640.82 C10.1@2708,1633.27 ; C10.1@2706.5,1633.27 2706.5,1316.5 2669,1279 2669,1124.27 v1(2670,1123.27) 2670,900 2720,850 2840,850 2863,827 C22.1 2914.61,841.61 U9.8 ; v1(2775,1128.27) 2810,1163.27 2810,1300 2870,1360 2870,1588.27 2897.55,1615.82 2906.05,1615.82 C6.1@2920,1629.76 ; U3.8 2920,1678.82 C6.1@2920,1629.76 ; C6.1 C6.1@2920,1629.76 ; C7.1@3020,1635.35 3014.41,1629.76 C6.1@2920,1629.76
  Top Layer w25: R10.1 847.28,1230 1080,1230 ; 1145,1723.27 1090,1668.27 1090,730 1270,550 K2.6 ; J2.18 1479.27,479.27 1500,500 v1(1500,550) ; v1(1730,550) 2231.73,550 2455,773.27 v1(2455,1128.27)
  Bottom Layer w10: v1@2560,1123.27 2565,1128.27 v1(2560,1128.27) ; v1@2765,1123.27 2775,1133.27 v1(2775,1128.27)
  Bottom Layer w25: K2.6 v1(1500,550) v1(1730,550) ; v1(2455,1128.27) v1(2560,1128.27) ; v1@2560,1123.27 v1(2670,1123.27) v1@2765,1123.27
-12v: C8.2 C11.2 C12.2 C15.2 C16.2 C17.2 C20.2 C21.2 C23.2 J2.5 K2.5 U3.5 U4.5 U5.5 U6.5 U8.4 U9.5 | length 6680.3
  Top Layer w10: C11.2 988.39,1765.35 995,1771.97 ; U6.5 1031.61,1808.58 995,1771.97 ; v1(1040,1633.27) 995,1678.27 995,1771.97 ; U8.4 2005.98,1244.76 2170.59,1244.76 C20.2 2232.91,1240.35 2280,1193.27 2445,1193.27 ; C17.2@2172.68,1828.27 2172.68,1727.68 2177.09,1723.27 C16.2@2179.49,1725.67 ; C16.2@2181.5,1708.27 2181.5,1561.77 2475,1268.27 v1(2475,1193.27) 2463.27,1193.27 v1@2460,1190 ; C16.2 2249.45,1708.27 U5.5 ; U4.5 2491.18,1720 2489.92,1720 2473.5,1703.58 2473.5,1374.76 2590,1258.27 v1(2590,1193.27) ; U3.5 2771.61,1658.15 2800,1629.76 2791.5,1629.76 2770,1608.27 2770,1253.27 v1(2710,1193.27) 2710,1140 2863,987 C23.2 2884.61,918.39 U9.5
  Top Layer w25: v1(1140,1633.27) 1140,760 1250,650 K2.5 ; J2.5 1533.62,463.62 1580,510 v1(1580,640) ; J2.5@1535.2,418.27 J2.5@1539.93,423 ; v1(1800,640) 2211.73,640 2395,823.27 2395,1143.27 2441.73,1190 v1@2460,1190
  Bottom Layer w25: v1(1040,1633.27) v1(1140,1633.27) ; K2.5 1370,640 v1(1580,640) v1(1800,640) ; v1(2475,1193.27) v1(2590,1193.27) ; v1@2610,1193.27 v1(2710,1193.27)
AUX1: J2.12 K1.1 | length 730.6
  Top Layer w10: K1.1 173.27,230 570,230 755.91,415.91 J2.12
AUX2: J2.24 K1.2 | length 748.3
  Top Layer w10: K1.2 691.24,168.27 J2.24
GAUSS: J2.7 U6.7 | length 2108.3
  Top Layer w10: U6.7 1082.8,1872.8 1110,1900 1318.27,1900 1420,1798.27 1420,1610 1210,1400 1210,750 1260,700 1400,700 1430,670 1430,520 1325.91,415.91 J2.7
GAUSS-I-TESTPAD: pad.5 Q1.E R11.1 U7.8 | length 407.3
  Top Layer w10: Q1.E 707,1081.27 766.3,1021.97 U7.8 879.45,1003.27 R11.1 880,1110 pad.5
GAUSS-I_N: P5.1 Q1.C | length 1468.5
  Top Layer w10: Q1.C 621.73,1188.27 530,1280 530,1808.27 1028,2306.27 P5.1
GND: C1.2 C2.2 C3.2 C4.2 C5.2 C6.2 C7.2 C8.1 C9.2 C10.2 C11.1 C12.1 C13.2 C14.2 C15.1 C16.1 C17.1 C18.2 C19.2 C20.1 C21.1 C22.2 C23.1 J1.G J2.1 J2.13 J2.25 J2.26 J2.27 J3.1 K2.1 K2.2 K2.3 R1.2 R2.2 R11.2 U1.3 U2.3 U4.6 U5.6 U7.2 U7.3 U7.6 U7.7 U9.1 | length 3669.9
  Top Layer w10: U7.2 U7.3 U7.6 U7.7 825,953.27 844.45,933.82 R11.2 v1(880,850) ; C11.1 887.09,1651.18 v1(910,1628.27) C15.1 C15.1@910,1706.77 ; C13.2@1230,1706.77 C13.2 v1(1230,1618.27) 1262.91,1651.18 C9.2 ; C4.2@1512.91,1713.27 1505,1721.18 1505,1783.27 v1(1485,1803.27) C5.2 C5.2@1563.5,1803.27 ; C18.2 1692.09,1236.18 v1(1745,1183.27) 1755,1173.27 C19.2 C19.2@1755,1291.77 ; R1.2 1786.38,871.89 v1(1830,828.27) 1876.38,874.65 C3.2@1876.38,905.79 ; v1(1800,500) J3.1 ; U2.3 v1@1872.2,1931.06 ; C3.2@1876.38,908.74 C3.2 C3.2@1876.38,905.79 ; v1@2002.09,833.27 v1(1996.38,817.89) U1.3 ; R2.2 2067,1973.27 v1(2098,1942.27) ; C17.1@2058.5,1828.27 C17.1 2045,1814.76 v1(2045,1738.27) 2055.59,1738.27 2070.59,1723.27 C16.1@2114.09,1723.27 ; C21.1@2075,1181.77 C21.1 v1(2075,1073.27) 2127.91,1126.18 C20.1 ; C1.2 2217.09,843.86 2140,843.86 2126.38,857.48 C2.2 2126.38,908.74 2122.44,904.8 U1.3 ; v1@2270,1680 v1(2290,1680) 2317.2,1707.2 U5.6 ; v1@2395,1503.27 C14.2@2395,1571.77 ; v1@2530,1690 2547.2,1707.2 U4.6 ; v1@2536.5,1534.76 2541.26,1530 v1(2550.63,1530) 2550.63,1619.13 C12.1@2536.5,1633.27 ; v1@2633.5,1534.76 C10.2@2633.5,1633.27 ; v1(2700,790) C22.2 ; v1@2700,940 v1(2710,940) C23.1 ; v1(2820,1488.27) C8.1 C8.1@2820,1556.77 ; C6.2@2920,1566.77 C6.2 2920,1508.27 2935,1493.27 v1@2935,1483.27 ; v1@2925,1473.27 v1(2935,1473.27) 2992.09,1473.27 C7.2 ; v1(3129.57,750.43) U9.1 ; C3.2@1876.38,905.79 1995.39,905.79 U1.3
  other v1: 2135,838.86 2395,1493.27 2630,1530 2520,1680 2690.59,1873.27 2198,1929.27 1885,1933.27 2207,2114.27 2546,2352.27
Heater_N: J2.10 J2.11 J2.22 P4.2 P4.3 | length 3341.9
  Top Layer w50: 882.99,525.28 882.99,418.27 991.69,418.27 1046.04,363.92 J2.22@1046.04,306.46
  Top Layer w85: P4.2@260,2381.66 260,2351.95 70,2161.95 70,730 250,550 858.27,550 882.99,525.28 ; P4.2 260,2548.27 310,2598.27 P4.3@510,2598.27
Heater_P: J2.8 J2.9 J2.20 P4.1 | length 3003.4
  Top Layer w50: 1100.39,512.87 1100.39,418.27 1209.09,418.27 1209.09,409.17 1263.44,354.82 J2.20@1263.44,306.46
  Top Layer w85: P4.1 210,2105.27 210,780 320,670 943.27,670 1100.39,512.87
NetC3_1: C3.1 R1.1 U1.2 U8.3 | length 479.3
  Top Layer w10: R1.1 1787.36,975.67 U1.2 1950,984.65 U8.3 U8.3@1950,1278.27
NetJ1_1: J1.1 U3.4 | length 673.2
  Top Layer w10: J1.1 2750,2238.86 2750,2040 2790,2000 2870,2000 2890,1980 2890,1900 2870,1880 2800,1880 2771.61,1908.39 U3.4
NetJ1_2: J1.2 U3.1 | length 386.5
  Top Layer w10: J1.2 2720,2118.86 2720,2020 2770,1970 2848.39,1970 U3.1
NetJ1_3: J1.3 U4.4 | length 423.4
  Top Layer w10: U4.4 2496.59,1954.59 2496.59,2204.27 2579.59,2287.27 J1.3@2600.59,2287.27
NetJ1_4: J1.4 U4.1 | length 317.6
  Top Layer w10: J1.4 2645.59,2093.27 2645.59,2000 2598.39,1952.8 U4.1
NetJ1_5: J1.5 U5.4 | length 581.8
  Top Layer w10: v1(2240,2030) 2240,1981.18 U5.4
  Bottom Layer w10: v1(2240,2030) 2240,2040 2300,2100 2461.73,2100 2500.59,2138.86 J1.5@2500.59,2287.27
NetJ1_6: J1.6 U5.1 | length 291.8
  Top Layer w10: U5.1 2450.59,2011.77 J1.6@2450.59,2187.27
NetP5_2: P5.2 U6.4 | length 490.1
  Top Layer w10: U6.4 980,2081.18 980,2160 1020,2200 1140,2200 1199,2259 P5.2
NetP5_3: P5.3 U6.1 | length 996.8
  Top Layer w10: P5.3@952,2658.27 1220,2658.27 1270,2608.27 1270,2170 1129.57,2029.57 U6.1
NetQ1_B: Q1.B R10.2 U7.1 | length 374.7
  Top Layer w10: U7.1 605,1003.27 632,1030.27 Q1.B 670,1146.27 738,1146.27 770.45,1113.82 R10.2@810,1113.82
NetR3_1: R3.1 R4.2 | length 137.8
  Top Layer w10: R3.1 3103.35,1723.82 R4.2
NetR3_2: R3.2 U3.7 | length 181.8
  Top Layer w10: U3.7 2822.8,1782.8 2828.27,1788.27 R3.2
NetR4_1: R4.1 R5.2 | length 81.1
  Top Layer w10: R4.1 R5.2
NetR7_1: R7.1 U4.2 | length 111.8
  Top Layer w10: U4.2 2572.8,1972.8 2604.45,2004.45 R7.1
NetR7_2: R7.2 U4.3 | length 103.5
  Top Layer w10: R7.2 2535.55,1984.45 2547.2,1972.8 U4.3
NetR8_1: R8.1 U5.2 | length 111.8
  Top Layer w10: U5.2 2342.8,1958.35 2374.45,1990 R8.1
NetR8_2: R8.2 U5.3 | length 103.5
  Top Layer w10: R8.2 2317.2,2016.61 U5.3
NetR9_1: R9.1 U6.2 | length 113.5
  Top Layer w10: U6.2 1082.8,2062.8 1114.45,2094.45 R9.1
NetR9_2: R9.2 U6.3 | length 105.3
  Top Layer w10: R9.2 1057.2,2118.35 U6.3
NetR12_1: R12.1 R12.3 R14.2 | length 401.4
  Top Layer w10: R14.2 3130,360 3230,260 R12.3 R12.1
NetR12_2: R12.2 U4.7 | length 1938.6
  Top Layer w10: U4.7 2572.8,1697.2 2590,1680 2590,1300 2630,1260 2630,642.63 2861.63,411 3169,411 3220,360 R12.2
NetR14_1: R14.1 R15.2 | length 332.8
  Top Layer w10: R15.2 2820,360 3020,160 R14.1
NetR14_3: R14.3 U9.4 | length 1524.9
  Top Layer w10: R14.3 3120,260 3280,100 3370,100 3390,120 3390,390 3350,430 3100,430 3070,460 3070,890 3098.39,918.39 U9.4
NetR15_1: R15.1 R15.3 U5.7 | length 1813.6
  Top Layer w10: U5.7 2342.8,1672.8 2300,1630 2300,1480 2520,1260 2520,730 2750,500 2750,320 R15.3 2810,180 R15.1@2800,170
NetR16_1: R16.1 U9.2 | length 109.4
  Top Layer w10: U9.2 3208.35,867.2 R16.1
NetR16_2: R16.2 U9.3 | length 109.4
  Top Layer w10: U9.3 3208.35,892.8 R16.2
SAMPLE-I_N: J1.8 J2.19 J2.21 J2.23 P2.2 P2.3 | length 6791.1
  Top Layer w20: P2.3@3190,2588.27 P2.3
  Top Layer w25: J1.8 2335,2203.86 2335,2328.27 2445,2438.27 P2.2@3040,2438.27
  Top Layer w35: P2.2@3040,2438.27 P2.2 P2.3@3190,2588.27
  Top Layer w85: J2.23 937.34,302.52 937.34,175.93 1055,58.27 1150,58.27 ; J2.21 1153.17,61.44 1150,58.27 ; J2.19 1370.57,78.84 1350,58.27 ; v2(2540,160) 2438.27,58.27 1350,58.27 ; P2.3 3450,2378.27 v2(3450,1290) ; 1150,58.27 1350,58.27
  Bottom Layer w85: v2(2540,160) 2540,410 2640,510 3350,510 3450,610 v2(3450,1290)
SAMPLE-I_P: J1.7 J2.3 J2.4 J2.16 P2.1 | length 4983.9
  Top Layer w25: J1.7 2400.59,2318.86 2478,2396.27 2762,2396.27 2840,2318.27 3240,2318.27 P2.1
  Top Layer w35: J1.7@2400.59,2287.27 J1.7
  Top Layer w50: J2.4@1643.9,418.27 1698.25,363.92 ; J2.16@1698.25,306.46 1698.25,363.92 ; J2.3@1752.6,418.27 1698.25,363.92
  Top Layer w85: J2.16@1698.25,306.46 1698.25,240.02 1778.27,160 v3(2390,160) ; P2.1 3340,2238.27 v3(3340,1290)
  Bottom Layer w85: v3(2390,160) 2420,190 2420,460 2580,620 3300,620 3340,660 v3@3340,1281
TEMP: J2.6 U2.5 U2.6 | length 1920.8
  Top Layer w10: J2.6 1424.92,480 1460,515.08 1460,774 1430,804 1326,804 1290,840 1290,1280 1720,1710 1720,1895.9 1684.83,1931.06 U2.6 U2.5
Term_N: P1.- R2.1 U2.1 | length 380
  Top Layer w10: U2.1 1901.61,1879.88
  Top Layer w35: 1901.61,1879.88 1933.5,1911.77 P1.-@1933.5,2151.77
Term_P: P1.+ U2.8 | length 406.6
  Top Layer w10: P1.+@1550,2153.27 P1.+ ; 1578.39,1879.88 U2.8
  Top Layer w35: P1.+@1550,2153.27 1550,1908.27 1578.39,1879.88
VH: J2.2 J3.2 | length 43.3
  Top Layer w10: J3.2 1856,472 J2.2@1856,440
VHAmp: J2.15 U9.7 | length 1439.2
  Top Layer w10: v1(2880,870) 2882.8,867.2 U9.7
  Bottom Layer w10: J2.15 1834.09,304.09 1890,360 2070,360 2190,480 2320,480 2540,700 2810,700 2880,770 v1(2880,870)
Vr: J2.14 R5.1 R6.1 R13.1 | length 3923.4
  Top Layer w10: J2.14 1914.07,285.93 1970,230 2550,230 2760,20 3420,20 3510,110 3510,950 3204.45,1255.55 3204.45,1888.27 R5.1 R13.1 R6.1
pads on no net: J1.A J1.B P1.NC P5. U2.4 U3.2 U3.3 U7.4 U7.5 U8.1 U8.5 U8.8

## Polygon pours and split planes (outlines as drawn)
no net on Top Solder "soldermask expansion" (solid): 2198,1929.27 2254,1873.27 2690.59,1873.27 2690.59,2073.27 2600,2163.86 2600,2207.68 2650.59,2258.27 2650.59,2313.27 2608.59,2355.27 2492.59,2355.27 2450.59,2313.27 2450.59,2258.27 2400.59,2208.27 2400.59,2168.27 2355.59,2123.27 2195,2123.27
GND on Bottom Layer "Bottom Layer-No Net" (solid, remove dead copper, pour order 0): 0,0 3543.31,0 3543.31,2795.28 0,2795.28

## Other copper
Bottom Layer:
  pour cut-out: 2690.59,2073.27 2690.59,1973.27 2199.27,1973.27 2196,1970 2196,2093.68 2225.59,2123.27 2355.59,2123.27 2400.59,2168.27 2400.59,2208.27 2450.59,2258.27 2450.59,2313.27 2489.59,2352.27 2611.59,2352.27 2650.59,2313.27 2650.59,2258.27 2600,2207.68 2600,2163.86
Multi-Layer:
  lines w10 net GND: 2196,1932.27 2255,1873.27 2690.59,1873.27 2690.59,2073.27 2600,2163.86 2600,2207.68 2650.59,2258.27 2650.59,2313.27 2608.59,2355.27 2492.59,2355.27 2450.59,2313.27 2450.59,2258.27 2400.59,2208.27 2400.59,2168.27 2355.59,2123.27 2225.59,2123.27 2196,2093.68 2196,1932.27

## Silkscreen, mask and mechanical layers (free items; w line width, h text height)
Top Overlay:
  text "2.5v" at 2320,1300 h60
  text "I=V/1k" at 980,1120 h60
  text "GND" at 1100,1020 h60
  text "GND" at 1100,920 h60
  text "GND" at 1100,820 h60
  text "5V" at 1160,710 h60
  text "-12V" at 1050,610 h60
  text "12V" at 1110,510 h60
Mechanical 1:
  the board outline again, w10

## Text inside footprints (layer, text, board x,y; h text height)
J2: Top Overlay "25" at 767.58,181.85 h59.06 r180; Top Overlay "14" at 1958.37,181.85 h59.06 r180; Top Overlay "13" at 578.43,455.91 h59.06 r180; Top Overlay "1" at 1978.27,555.87 h59.06 r180
R12: Top Overlay "CW" at 3258.31,132.44 h25 r90
R14: Top Overlay "CW" at 2998.31,132.44 h25 r90
R15: Top Overlay "CW" at 2748.31,132.44 h25 r90